# Altium PCB PIC18F14K50 Male.PcbDoc
Units mil, origin at the board's own origin, x right, y up, seen from the top; angles counter-clockwise.
Board outline 1336.61 x 574.8 mil, 2 copper layers (Top Layer, Bottom Layer); 12 components, 19 nets, 64 pads, 25 vias.
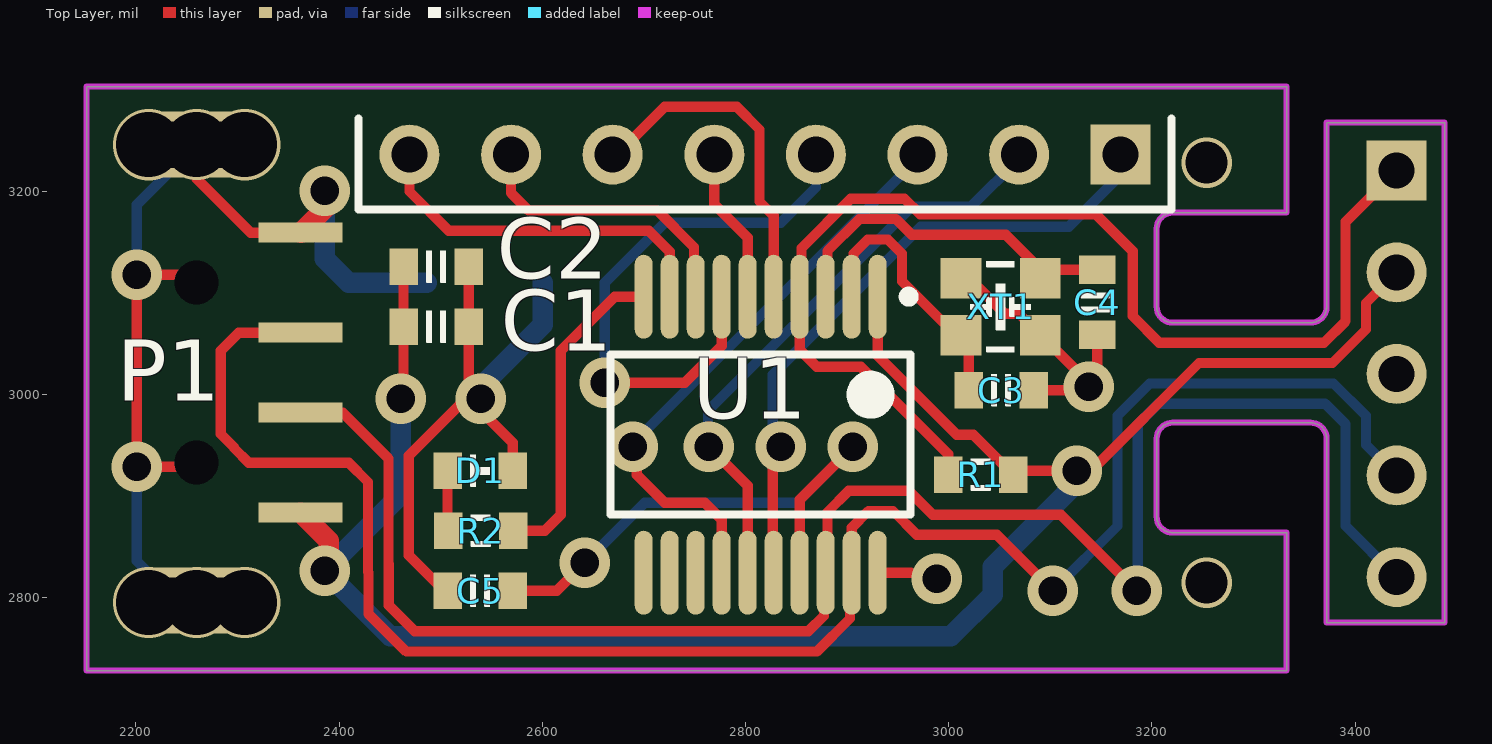
[diagram p0: Top Layer view]
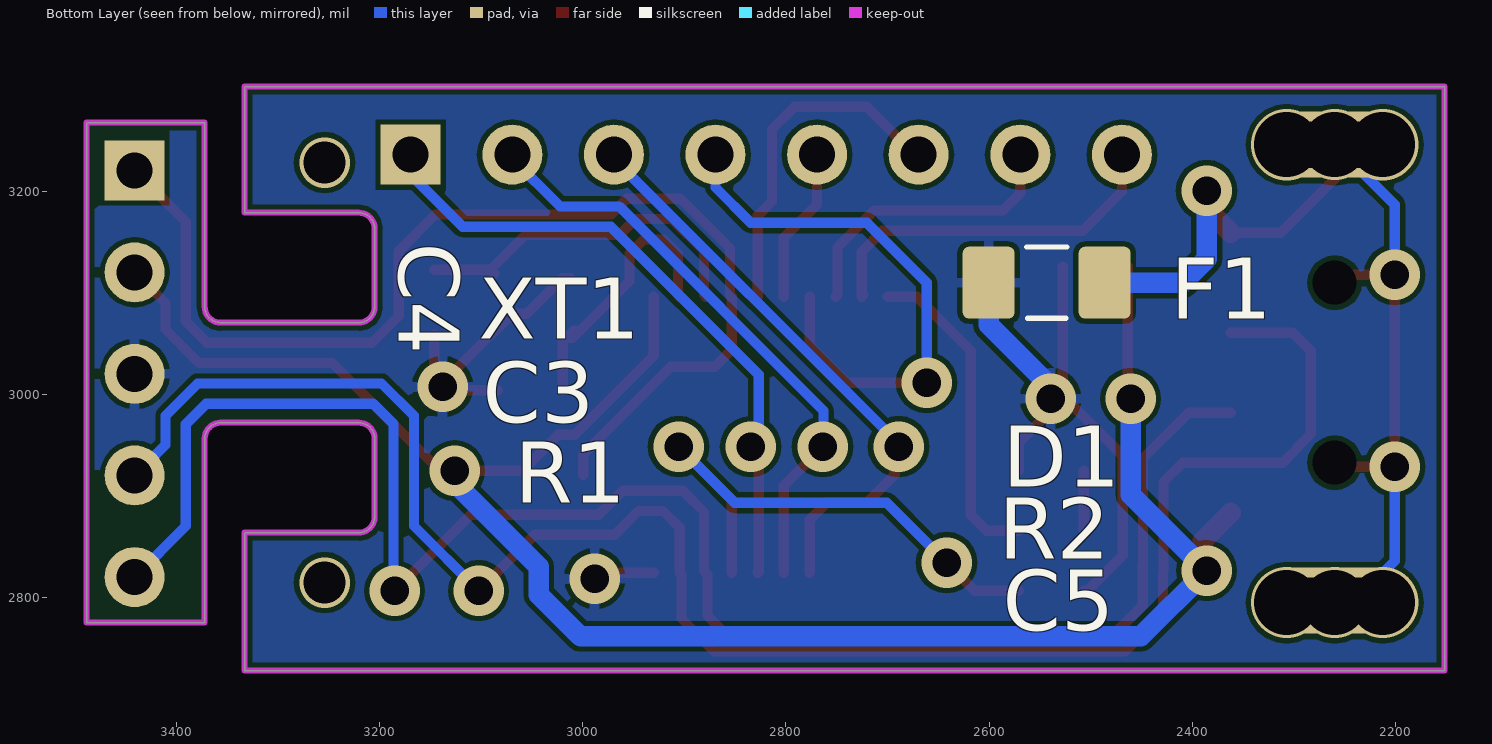
[diagram p1: Bottom Layer view, seen from below]
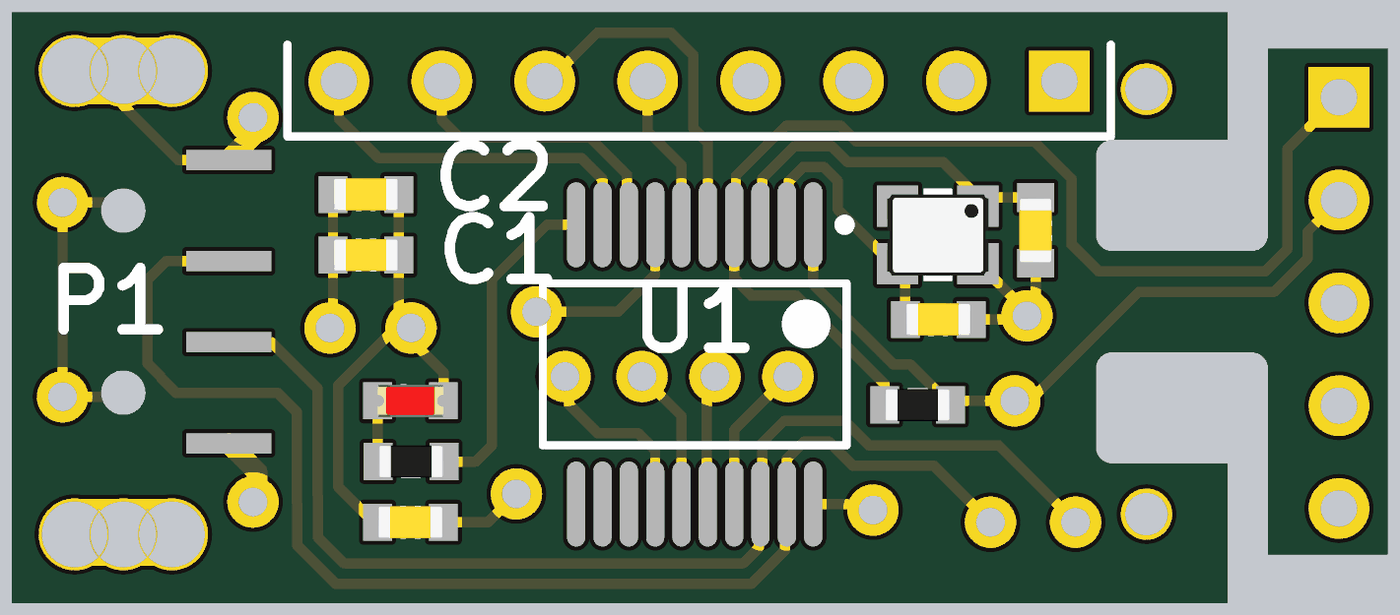
[diagram p2: 3D render of the assembled board from above, using the file's embedded part models]

## Layer stack, top to bottom
Top Layer: signal copper 1.4
Dielectric: dielectric 12.6, FR-4, Dk 4.8
Bottom Layer: signal copper 1.4

## Board outline
3204.72,2879.92 3204.72,2956.69 cw(c3220.47,2956.69) 3220.47,2972.44 3356.3,2972.44 cw(c3356.3,2956.69) 3372.05,2956.69 3372.05,2775.59 3488.19,2775.59 3488.19,3267.72 3372.05,3267.72 3372.05,3086.61 cw(c3356.3,3086.61) 3356.3,3070.87 3220.47,3070.87 cw(c3220.47,3086.61) 3204.72,3086.61 3204.72,3163.39 cw(c3220.47,3163.39) 3220.47,3179.13 3332.68,3179.13 3332.68,3303.15 2151.57,3303.15 2151.57,2728.35 3332.68,2728.35 3332.68,2864.17 3220.47,2864.17 cw(c3220.47,2879.92)

## Design rules (kind name [scope] priority, off if disabled: settings)
Clearance [All] p1: gap=5
MinimumSolderMaskSliver [All] p1: minsoldermaskwidth=3.5
PolygonConnect [All] p1: connectstyle=Relief reliefconductorwidth=10 reliefentries=4 polygonreliefangle="90 Angle"
RoutingVias [All] p1: holewidth=28 width=50 viastyle="Through Hole" minholewidth=28 minwidth=50 maxholewidth=28 maxwidth=50
SilkscreenOverComponentPads [All] p1: minsilkscreentomaskgap=10
SolderMaskExpansion [All] p1: expansion=4
Width [All] p1: maxlimit=20 minlimit=10 preferedwidth=10
26 further rules are at their usual default settings.

## Components (designator, comment, footprint, x,y, rotation, side; value= is the part's Value field where it differs from the comment)
C1 "Cap_0603" CAP_0603 2495.56,3066.93 r180 top
C2 "Cap_0603" CAP_0603 2495.56,3125.98 r180 top
C3 "Cap_0603" CAP_0603 3051.68,3004.38 r180 top
C4 "Cap_0603" CAP_0603 3146.17,3090.99 r90 top
C5 "Cap_0603" CAP_0603 2538.87,2807.09 r0 top
D1 "LED_0603" LED_0603_RED 2538.87,2925.2 r0 top
F1 "Slow-blow" RESC3216X70N 2543.31,3110.24 r0 bottom
P1 "USB_Plug_TypeA" USB_Plug_TypeA 2153.54,3021.65 r180 top
R1 "Res_0603" RES_0603 3031.5,2921.26 r0 top
R2 "Res_0603" RES_0603 2539.37,2866.14 r0 top
U1 "PIC18F14K50-I/SS" SSOP-SS20_N 2814.96,2960.63 r270 top
XT1 "XTAL_2520_4P" XT_2520_4 3051.18,3086.61 r180 top

## Footprints (in the part's own frame and the unit in brackets; to place one, negate y for a bottom-side part, rotate by r counter-clockwise, add the part's x,y. Pads: shape width x height; smd on the part's side, far side on the other; paste and mask are expansions set on the pad)
CAP_0603 [mil]
  rect 28x36 smd: 1(-32,0) 2(32,0)
  silkscreen extent -10,-16 10,16, body extent -31,-16 32,16, height 36
LED_0603_RED [mil]
  rect 28x36 smd: 1(-32,0) 2(32,0)
  silkscreen extent -10,-16 10,16, body extent -32,-16 32,16, height 24
RES_0603 [mil]
  rect 28x36 smd: 1(-32,0) 2(32,0)
  silkscreen extent -10,-16 10,16, body extent -31,-16 32,16, height 20
RESC3216X70N [mm] "Chip Resistor, Body 3.2x1.6mm, EIA 1206, IPC Medium Density"
  round 0.508 on Mech15: 0(0,0)
  rrect25% 1.3x1.8 smd: 1(-1.45,0) 2(1.45,0)
  silkscreen extent -0.51,-0.89 0.51,0.89, body extent -1.62,-0.82 1.63,0.83, height 0.69
SSOP-SS20_N [mm] "SOP, 20-Leads, Body 7.2x5.2mm, Pitch 0.65mm, IPC Medium Density"
  oval 2.1x0.45 smd: 1(-3.45,2.925) 2(-3.45,2.275) 3(-3.45,1.625) 4(-3.45,0.975) 5(-3.45,0.325) 6(-3.45,-0.325) 7(-3.45,-0.975) 8(-3.45,-1.625) 9(-3.45,-2.275) 10(-3.45,-2.925) 11(3.45,-2.925) 12(3.45,-2.275) 13(3.45,-1.625) 14(3.45,-0.975) 15(3.45,-0.325) 16(3.45,0.325) 17(3.45,0.975) 18(3.45,1.625) 19(3.45,2.275) 20(3.45,2.925)
  silkscreen extent -3.57,-3.75 2,3.83, body extent -2.7,-3.75 2.7,3.75, height 2
USB_Plug_TypeA [mm]
  rect 2.1x0.5 smd: 1(-5.3,3.5) 2(-5.3,1) 3(-5.3,-1) 4(-5.3,-3.5)
  oval 4x1.65 hole 1.143 slot 3.048 at 0 deg unplated: 4(-2.7,5.7) 4(-2.7,-5.7)
  round 0.8 hole 1.1 unplated: 4(-2.7,2.25) 4(-2.7,-2.25)
XT_2520_4 [mil]
  rect 40x40 smd: 1(39,28) 2(-39,28) 3(-39,-28) 4(39,-28)
  silkscreen extent -30,-44 30,44, body extent -49,-39 49,39, height 31

## Part data
C1 C2 C3 C4 C5: "Capacitor"
D1: "LED"
F1: library part FUSE_160mA_1206, "Fuse 750mA 6VDC 1206 SMD"
P1: "USB"
R1 R2: "Resistor"
U1: "USB Flash Microcontroller with nanoWatt XLP Technology, 20-pin SSOP, Industrial Temperature"
XT1: "Crystal Oscillator"

## Free pads (board coordinates)
  rect 59.06x59.06 hole 35.43: 1(3169.29,3236.22) 1(3440.95,3220.47)
  round 59.06 hole 35.43: 2(3069.29,3236.22) 2(3440.95,3120.47) 3(2969.29,3236.22) 3(3440.95,3020.47) 4(2869.29,3236.22) 4(3440.95,2920.47) 5(2769.29,3236.22) 5(3440.95,2820.47) 6(2669.29,3236.22) 7(2569.29,3236.22) 8(2469.29,3236.22)

## Via types
v1: diameter 50, hole 28, Top Layer to Bottom Layer, 17 vias
v2: diameter 70, hole 64, Top Layer to Bottom Layer, 6 vias
v3: diameter 50, hole 41.34, Top Layer to Bottom Layer, 2 vias

## Nets (pads, with @x,y where several pads share a name; then routed paths per layer and width w, separated by ;. In a path a pad name is that pad's centre, name@x,y a point inside that pad or via, vN(x,y) a via of type N, cw(c..) or ccw(c..) an arc to the next point about the centre after c; other vN are vias at no path point)
GND: C1.1 C2.1 C3.1 C4.1 C5.1 D1.2 F1.2 pad.3@3440.95,3020.47 U1.20 XT1.2 XT1.4 | length 924.2
  Top Layer w10: C5.1 2503.35,2807.09 2468.5,2841.93 2468.5,2940.05 2527.56,2999.11 C1.1 C2.1 ; v1(2539.37,2996.06) 2533.46,2990.16 2570.87,2952.76 D1.2 ; U1.20 2962.6,2824.8 ; XT1.4 3020.18,3114.61 3055.18,3079.61 3069.18,3079.61 XT1.2@3085.8,3062.99 ; C3.1 v1@3145.35,3004.38 ; XT1.2 XT1.2@3085.8,3062.99 ; C4.1 3146.17,3004.38 v1@3145.35,3004.38 ; XT1.2@3085.8,3062.99 3086.74,3062.99 v1@3145.35,3004.38
  Bottom Layer w20: v1(2539.37,2996.06) 2539.37,3007.87 2600.39,3068.9 F1.2
  other v1: 2988.19,2818.9 3137.8,3007.87
NetC5_2: C5.2 U1.17 | length 530.9
  Top Layer w10: C5.2 2614.17,2807.08 v1(2641.73,2834.65) ; U1.17 2853.35,2896.65 2889.76,2933.07 v1@2889.76,2948.19
  Bottom Layer w10: v1(2641.73,2834.65) 2700.79,2893.7 2850.39,2893.7 2889.76,2933.07 2889.76,2948.82 v1@2893.7,2952.76
  other v1: 2905.51,2948.82
NetD1_1: D1.1 R2.1 | length 59.1
  Top Layer w10: R2.1@2506.87,2866.15 D1.1
NetF1_1: F1.1 P1.4 | length 998.5
  Top Layer w10: P1.4@2259.84,2933.07 2255.91,2929.13 v1(2200.79,2929.13) v1(2200.79,3118.11) 2251.97,3118.11 P1.4@2259.84,3110.24 ; v2(2259.84,3246.06) 2259.84,3212.6 2312.99,3159.45 P1.4@2362.2,3159.45 ; v1@2385.83,3183.07 v1(2385.83,3200.79)
  Top Layer w20: P1.4@2362.2,3159.45 v1@2385.83,3183.07
  Bottom Layer w10: v1(2200.79,2929.13) 2200.79,2836.3 P1.4@2239.84,2797.24 ; v1(2200.79,3118.11) 2200.79,3187.01 v2(2259.84,3246.06)
  Bottom Layer w20: v1(2385.83,3200.79) 2385.83,3133.86 2409.45,3110.24 F1.1
  other v2: 2212.6,2795.28 2259.84,2795.28 2307.09,2795.28 2212.6,3246.06 2307.09,3246.06
NetR2_2: R2.2 U1.10 | length 318.4
  Top Layer w10: R2.2 2602.36,2866.14 2618.11,2881.89 2618.11,3043.31 2671.26,3096.46 U1.10
OSC1: C4.2 U1.3 XT1.3 | length 350.5
  Top Layer w10: U1.3 2880.67,3098.19 2880.67,3141.51 2911.95,3172.8 2948.28,3172.8 2963.6,3157.48 3056.25,3157.48 XT1.3@3090.74,3122.99 ; XT1.3@3086.74,3118.99 XT1.3@3090.74,3122.99 ; C4.2 XT1.3@3090.74,3122.99
OSC2: C3.2 U1.2 XT1.1 | length 282.8
  Top Layer w10: U1.2 2906.26,3098.19 2906.26,3138.82 2920.24,3152.8 2940,3152.8 2953.98,3138.82 2953.98,3111.61 3009.6,3055.98 XT1.1@3015.75,3055.98 ; XT1.1@3003.53,3062.99 3008.74,3062.99 XT1.1@3015.75,3055.98 ; C3.2 3019.68,3052.06 XT1.1@3015.75,3055.98
PGC: P1.2 pad.5@3440.95,2820.47 U1.18 | length 1714.1
  Top Layer w10: P1.2 2403.54,2982.28 2448.5,2937.32 2448.5,2833.65 2448.82,2833.34 2448.82,2792.74 2474.47,2767.09 2861.85,2767.09 2877.2,2782.44 2877.2,2823.07 U1.18 2880.67,2826.54 2880.67,2884.61 2901.57,2905.51 2960.63,2905.51 2984.25,2881.89 3110.24,2881.89 v1(3185.04,2807.09)
  Bottom Layer w10: v1@3173.23,2807.09 3186.11,2819.97 3186.11,2970.93 3206.24,2991.05 3370.53,2991.05 3390.66,2970.93 3390.66,2870.76 pad.5@3440.95,2820.47
PGD: P1.3 pad.4@3440.95,2920.47 U1.19 | length 1833.7
  Top Layer w10: P1.3 2301.18,3061.02 2283.46,3043.31 2283.46,2961.28 2296.5,2948.25 2296.5,2947.6 2311.02,2933.07 2409.45,2933.07 2428.5,2914.02 2428.5,2825.37 2428.82,2825.05 2428.82,2784.46 2466.19,2747.09 2870.14,2747.09 2902.8,2779.75 2902.8,2823.07 U1.19 2904.53,2869.09 2920.95,2885.51 2945.2,2885.51 2968.5,2862.2 3047.24,2862.2 v1(3102.36,2807.09)
  Bottom Layer w10: v1(3102.36,2807.09) 3166.11,2870.84 3166.11,2979.21 3197.96,3011.05 3378.82,3011.05 3410.66,2979.21 3410.66,2950.76 pad.4@3440.95,2920.47
RC0: pad.1@3169.29,3236.22 U1.16 | length 648.1
  Top Layer w10: U1.16 2826.77,2825.79 2826.77,2933.07 v1@2842.51,2948.81
  Bottom Layer w10: v1@2842.51,2948.81 2826.77,2964.56 2826.77,3019.68 2972.44,3165.35 3118.11,3165.35 3169.29,3216.54 pad.1@3169.29,3232.28
  other v1: 2834.64,2948.81
RC1: pad.2@3069.29,3236.22 U1.15 | length 604.3
  Top Layer w10: v1@2763.77,2968.5 2771.65,2960.62 2771.65,2940.95 2802.17,2910.43 U1.15
  Bottom Layer w10: v1(2763.78,2948.82) 2763.05,2949.54 2763.05,2984.25 2964.16,3185.35 3022.36,3185.35 pad.2@3069.29,3232.28
RC2: pad.3@2969.29,3236.22 U1.14 | length 579.7
  Top Layer w10: v1@2700.79,2944.88 2692.91,2937.01 2692.91,2921.26 2720.47,2893.7 2759.84,2893.7 2776.57,2876.97 U1.14
  Bottom Layer w10: v1@2700.79,2944.88 2700.79,2963.78 pad.3@2969.29,3232.28
  other v1: 2688.98,2948.82
RC3: pad.4@2869.29,3236.22 U1.7 | length 551.9
  Top Layer w10: v1(2661.42,3011.81) 2740.16,3011.81 2776.57,3048.23 U1.7
  Bottom Layer w10: v1(2661.42,3011.81) 2661.42,3110.24 2720.47,3169.29 2834.65,3169.29 2869.29,3203.94 pad.4@2869.29,3232.28
RC4: pad.5@2769.29,3236.22 U1.6 | length 149.4
  Top Layer w10: pad.5@2769.29,3232.28 2769.29,3187.4 2802.17,3154.53 U1.6
RC5: pad.6 U1.5 | length 345.3
  Top Layer w10: pad.6@2669.29,3232.28 2720.47,3283.46 2791.34,3283.46 2813.82,3260.98 2813.82,3190.12 2827.76,3176.18 U1.5
RC6: pad.7 U1.8 | length 285.3
  Top Layer w10: pad.7@2569.29,3232.28 2569.29,3198.43 2586.3,3181.42 2713.01,3181.42 2749.25,3145.17 2749.25,3098.19 U1.8
RC7: pad.8 U1.9 | length 359.7
  Top Layer w10: pad.8@2469.29,3232.28 2469.29,3200 2507.87,3161.42 2704.72,3161.42 2725.39,3140.75 U1.9 U1.9@2723.66,3098.19
VCC: C1.2 C2.2 P1.1 pad.2@3440.95,3120.47 R1.2 U1.1 | length 1971.1
  Top Layer w10: v1(2460.63,2996.06) 2463.56,2998.99 C1.2 C2.2 ; U1.1 2930.12,3038.39 3007.87,2960.63 3024.13,2960.63 3059.57,2925.19 v1(3125.98,2925.19) 3140.38,2925.19 3246.37,3031.18 3377.74,3031.18 3410.66,3064.1 3410.66,3090.19 pad.2@3440.95,3120.47
  Top Layer w20: P1.1 2389.76,2856.3 2389.76,2830.71 v1(2385.82,2826.77)
  Bottom Layer w20: v1(2460.63,2996.06) 2460.63,2901.57 v1(2385.82,2826.77) 2450.5,2762.09 3002.24,2762.09 3043.31,2803.15 3043.31,2830.71 3125.98,2913.38 v1(3125.98,2925.19)
VPP: pad.1@3440.95,3220.47 R1.1 U1.4 | length 1139.1
  Top Layer w10: R1.1 2999.5,2941.45 2913.39,3027.56 2870.08,3027.56 2853.35,3044.29 U1.4 2855.08,3098.19 2855.08,3144.21 2903.67,3192.8 2956.57,3192.8 2971.88,3177.48 3144.89,3177.48 3181.1,3141.27 3181.1,3077.39 3207.31,3051.18 3369.46,3051.18 3390.66,3072.38 3390.66,3170.19 pad.1@3440.95,3220.47
pads on no net: F1.0 U1.11 U1.12 U1.13
copper on no net:
  other v3: 3253.94,2814.96 3253.94,3228.35

## Polygon pours and split planes (outlines as drawn)
GND on Bottom Layer "Bottom Layer-No Net" (solid, remove dead copper, pour order 10): 2151.57,2728.35 2151.57,3303.15 3332.68,3303.15 3332.68,3179.13 3220.47,3179.13 3204.72,3163.39 3204.72,3086.61 3220.47,3070.87 3356.3,3070.87 3372.05,3086.61 3372.05,3267.72 3488.19,3267.72 3488.19,2775.59 3372.05,2775.59 3372.05,2956.69 3356.3,2972.44 3220.47,2972.44 3204.72,2956.69 3204.72,2879.92 3220.47,2864.17 3332.68,2864.17 3332.68,2736.22 3332.68,2728.35 2151.57,2728.35

## Keep-outs
Keep-Out Layer:
  the board outline again, w5.91

## Silkscreen, mask and mechanical layers (free items; w line width, h text height)
Top Overlay:
  lines w7.87: 2419.29,3271.65 2419.29,3182.28 3219.29,3182.28 3219.29,3271.65